# EAGLE board g29_load_cell (EAGLE 9.5.2)
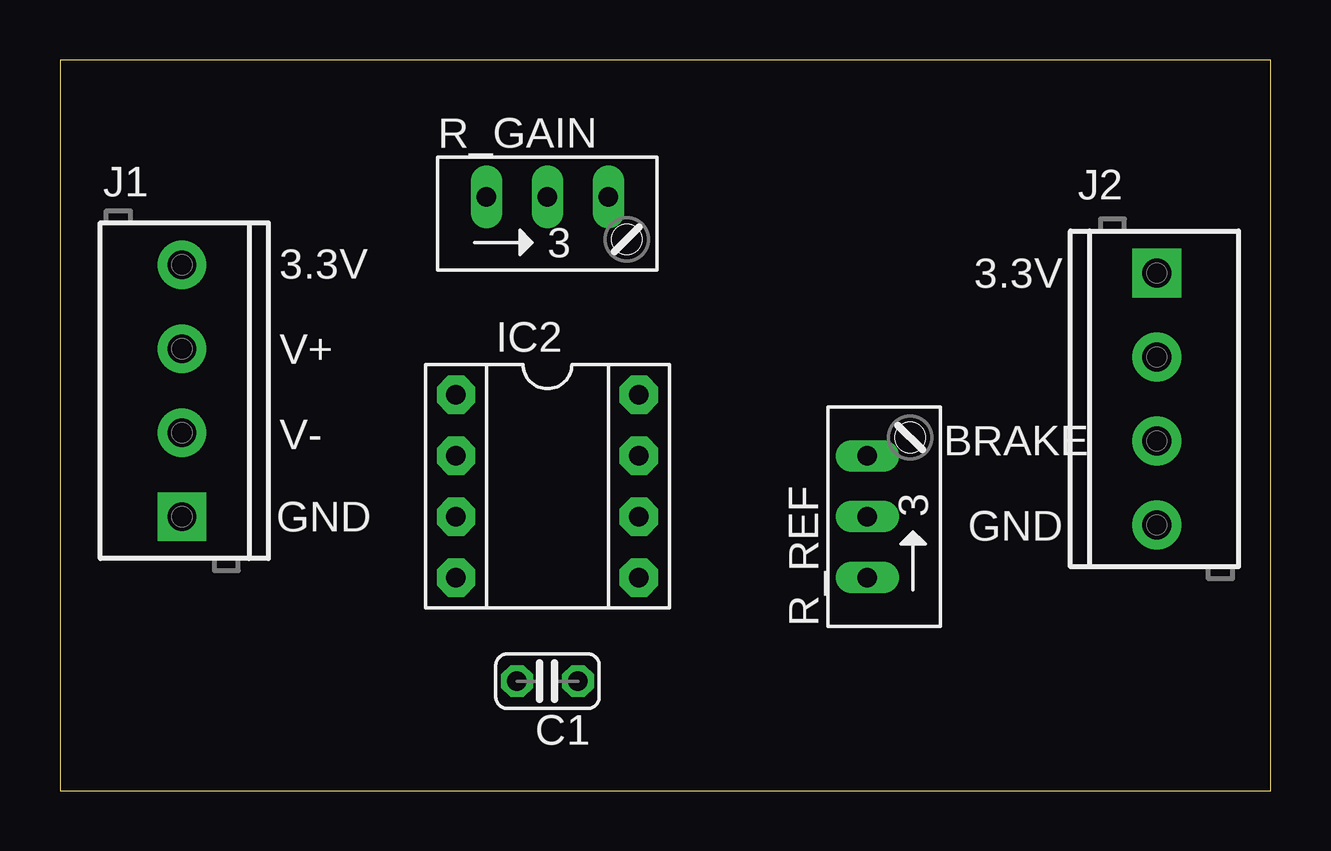
[diagram p0: board, top side]
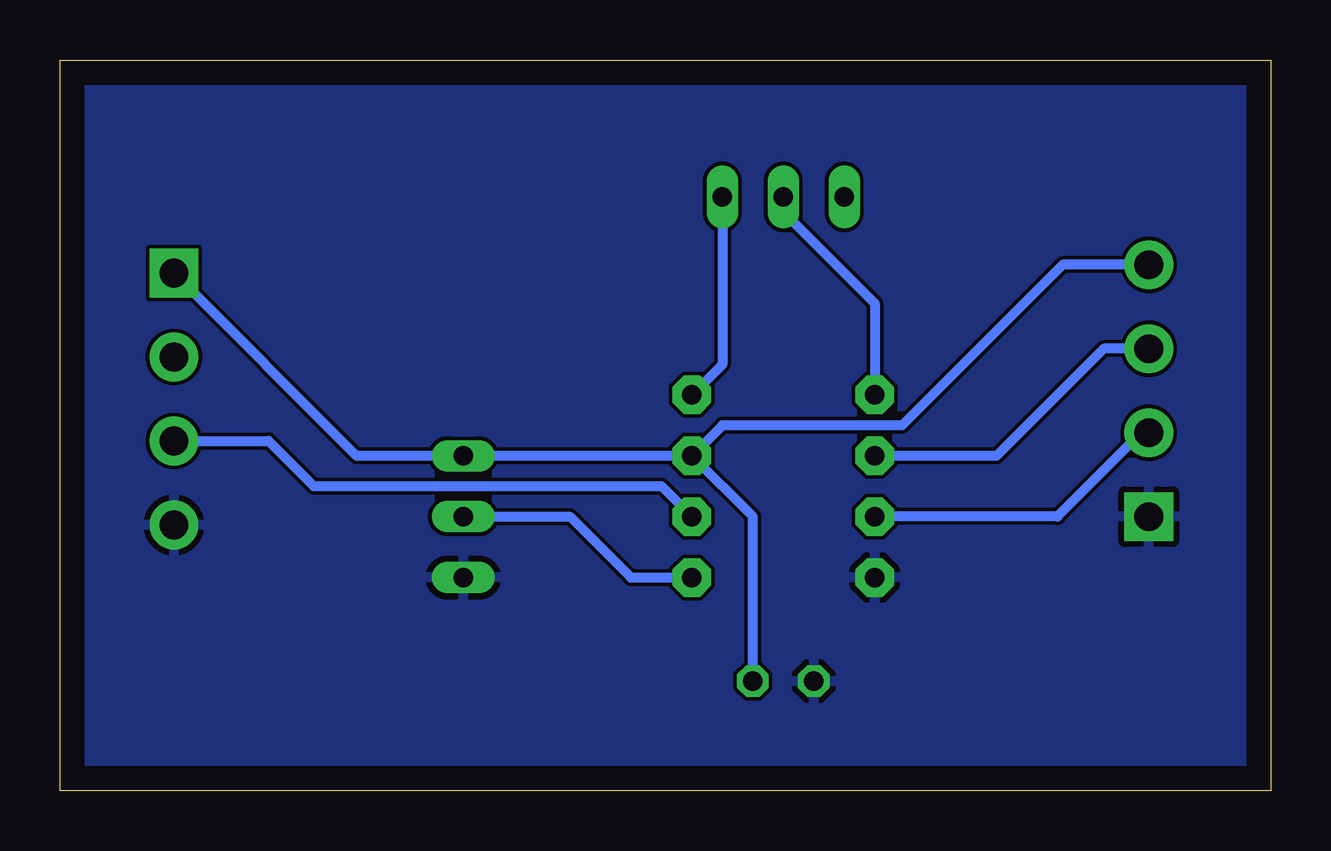
[diagram p1: board, bottom side, seen from below]

Size 50.47 x 30.47 mm. Coordinates in mm from the lower left corner, seen from the top.
Outline: 0,0 50.47,0 50.47,30.47 0,30.47 0,0
Copper layers (1*16): Top 0.035mm / dielectric 1.5mm / Bottom 0.035mm
Design rules "default": minimum track width 6mil, minimum drill 0.35mm, track to track 6mil, track to pad 6mil, pad to pad 6mil, via to via 6mil, smd to smd 6mil, copper to edge 40mil, drill to drill 6mil, minimum pad ring 10mil, minimum via ring 8mil, stop-mask expansion 4mil, vias tented up to drill 0mil, thermal gap 10mil

## Footprints (pad centres in the part's own frame; a part is rotated, then mirrored left to right if it is on the bottom)
C025-024X044 = drill 0.813 octagon: 1 -1.27,0; 2 1.27,0
DIL08 = drill 0.813 pad 1.6 octagon: 1 -3.81,-3.81; 2 -1.27,-3.81; 3 1.27,-3.81; 4 3.81,-3.81; 5 3.81,3.81; 6 1.27,3.81; 7 -1.27,3.81; 8 -3.81,3.81
SCREWTERMINAL-3.5MM-4 = drill 1.2 pad 2.032 square: 1 0,0 | drill 1.2 pad 2.032: 2 3.5,0; 3 7,0; 4 10.5,0
RJ9W = drill 0.813 long: A 2.54,0.635; E -2.54,0.635; S 0,0.635

## Placement (x,y rotation side)
C1  0.1uF  [C025-024X044]  20.32,4.57 180 top
IC2  INA122P  [DIL08]  20.32,12.7 270 top
J1  LOAD_CELL  [SCREWTERMINAL-3.5MM-4]  5.08,11.43 90 top
J2  G29  [SCREWTERMINAL-3.5MM-4]  45.72,21.59 270 top
R_GAIN  1k  [RJ9W]  20.32,24.13 0 top
R_REF  2k  [RJ9W]  34.29,11.43 90 top

## Library data of the parts
C1 = rcl; SPICEPREFIX: C
IC2 = g29_load_cell; MF: TEXAS INSTRUMENTS; MPN: INA122P; OC_FARNELL: 1459460; OC_NEWARK: 15M0948
J1 J2 = SparkFun-Connectors; PROD_ID: CONN-14485
R_GAIN R_REF = pot

## Nets
3.3V: C1.1 IC2.7 J1.4 J2.1 R_REF.A
GND: C1.2 IC2.4 J1.1 J2.4 R_REF.E
N$1: IC2.8 R_GAIN.A
N$2: IC2.1 R_GAIN.S
N$3: IC2.3 J1.2
N$4: IC2.2 J1.3
N$6: IC2.5 R_REF.S
N$7: IC2.6 J2.3

## Tracks (layer width: path | path; a pad name or v marks a point on that pad's centre or on a via)
3.3V
  Bottom 0.406: J1.4 8.68,21.93 15.37,15.24 22.86,15.24 IC2.7 | C1.1 21.59,11.43 IC2.7 | J2.1 38.1,13.97 R_REF.A IC2.7
GND
  pour Bottom: 0,0 50.8,0 50.8,30.48 0,30.48
N$1
  Bottom 0.406: R_GAIN.A 22.86,17.78 IC2.8
N$2
  Bottom 0.406: R_GAIN.S 20.32,24.13 16.51,20.32 IC2.1
N$3
  Bottom 0.406: J1.2 5.39,14.93 8.89,11.43 IC2.3
N$4
  Bottom 0.406: J1.3 6.97,18.43 11.43,13.97 IC2.2
N$6
  Bottom 0.406: R_REF.S 29.21,11.43 26.67,8.89 IC2.5
N$7
  Bottom 0.406: J2.3 41.78,14.59 39.89,12.7 25.4,12.7 IC2.6

## Text on the board
tNames: 3.3V | 3.3V | V+ | V- | BRAKE | GND | GND